# Altium PCB PCB1.PcbDoc
Units mm, origin at the board's own origin, x right, y up, seen from the top; angles counter-clockwise.
Board outline 86.9 x 32.8 mm, 4 copper layers (Top Layer, Signal Layer 1, Internal Plane 1, Bottom Layer), stack 1.48 mm thick; 44 components, 33 nets, 156 pads, 56 vias.
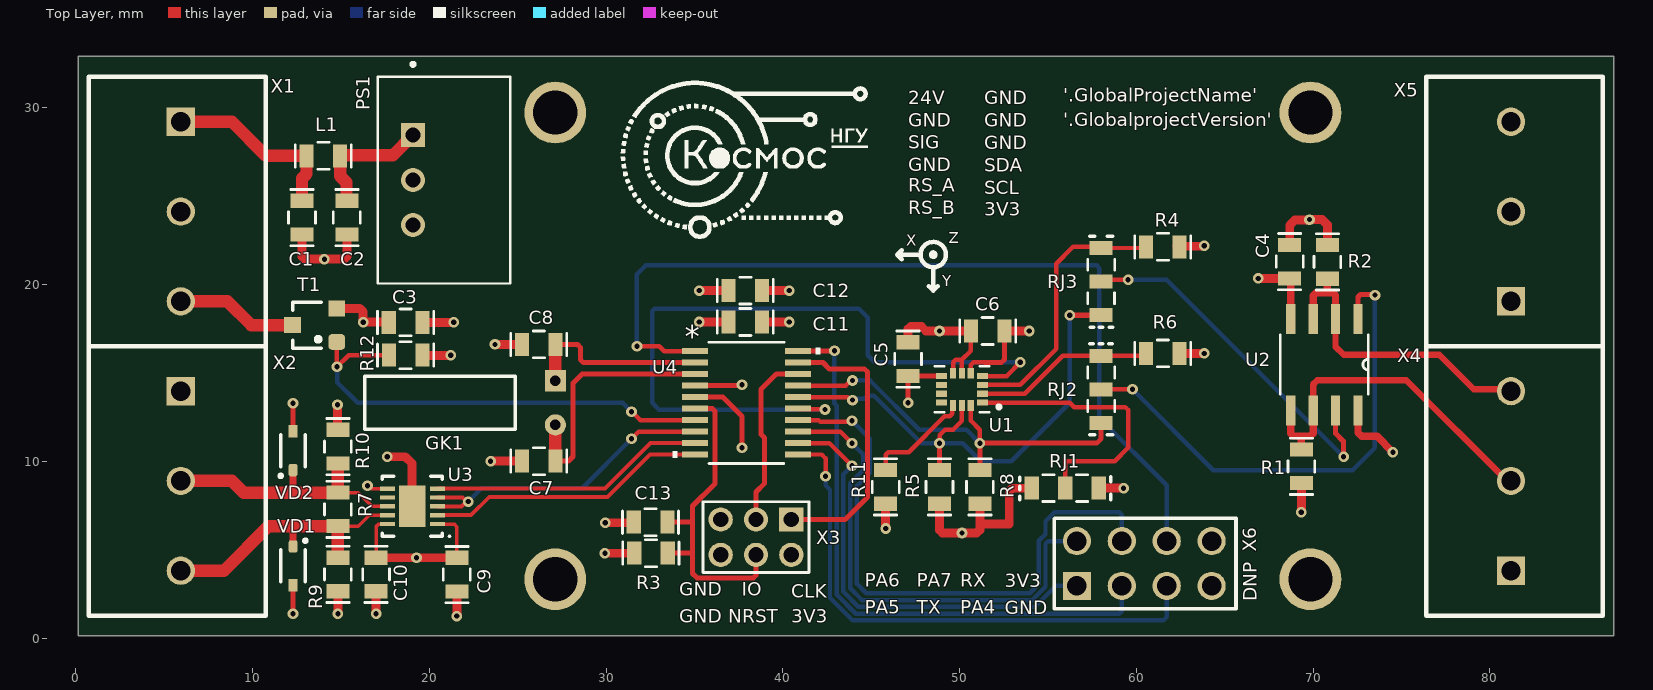
[diagram p0: Top Layer view]
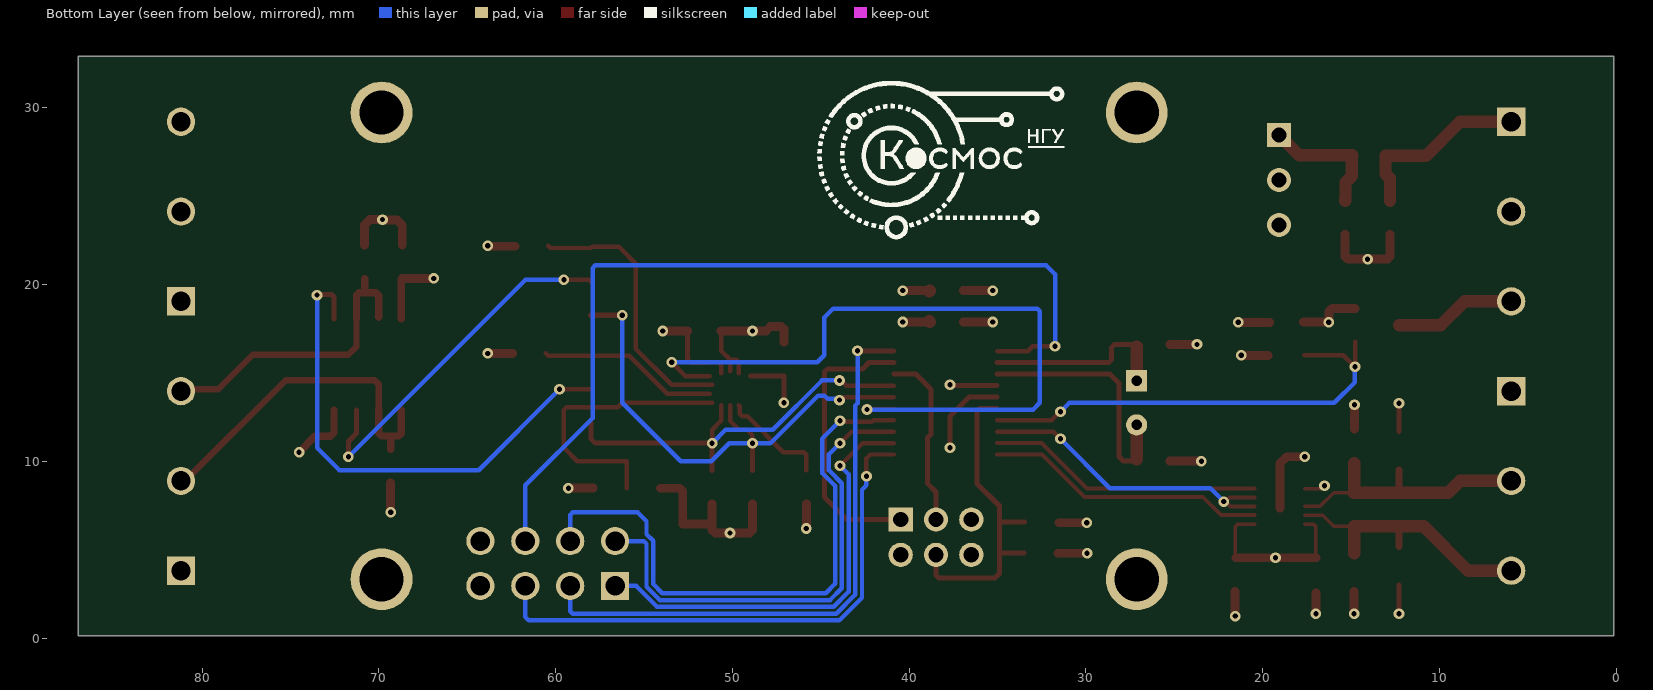
[diagram p1: Bottom Layer view, seen from below]
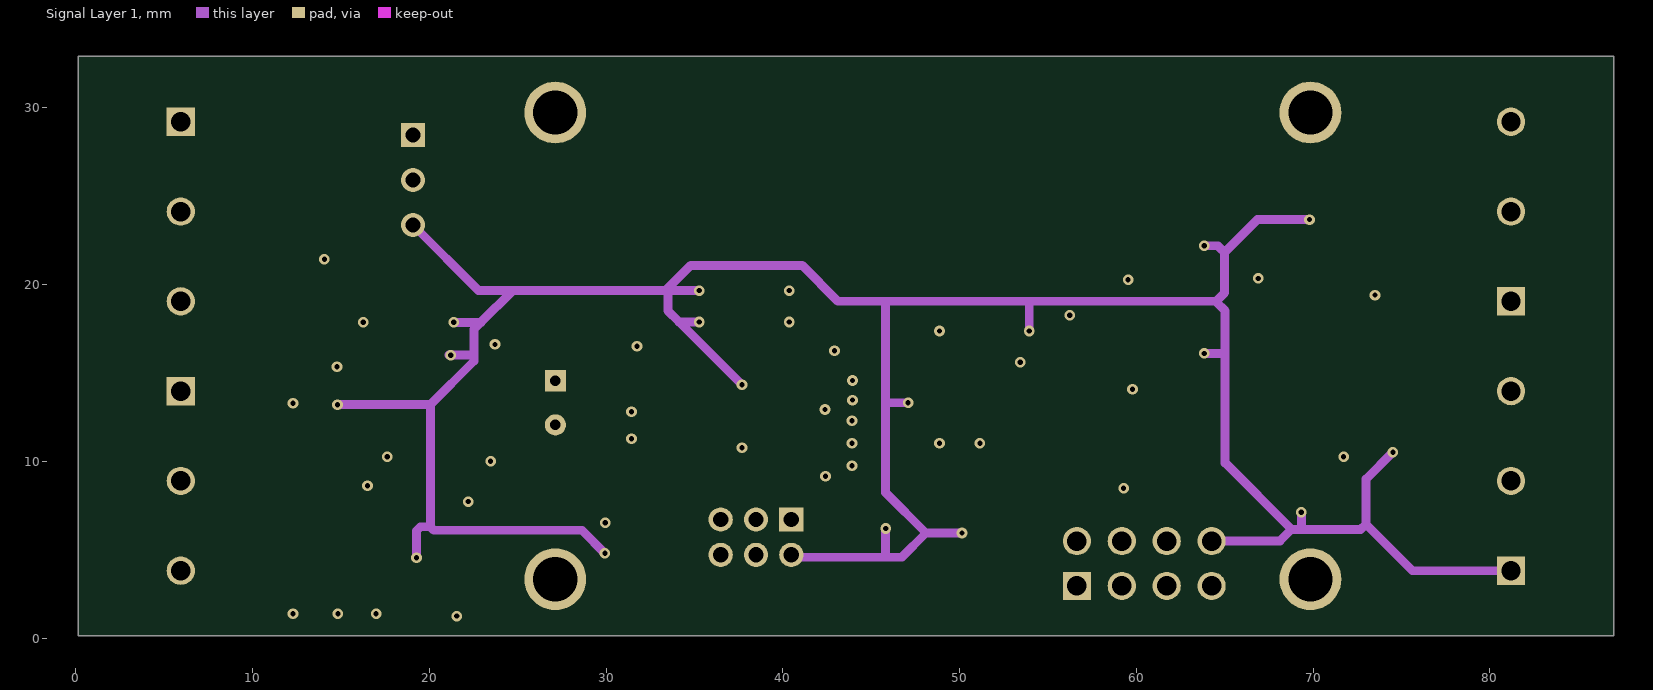
[diagram p2: Signal Layer 1]
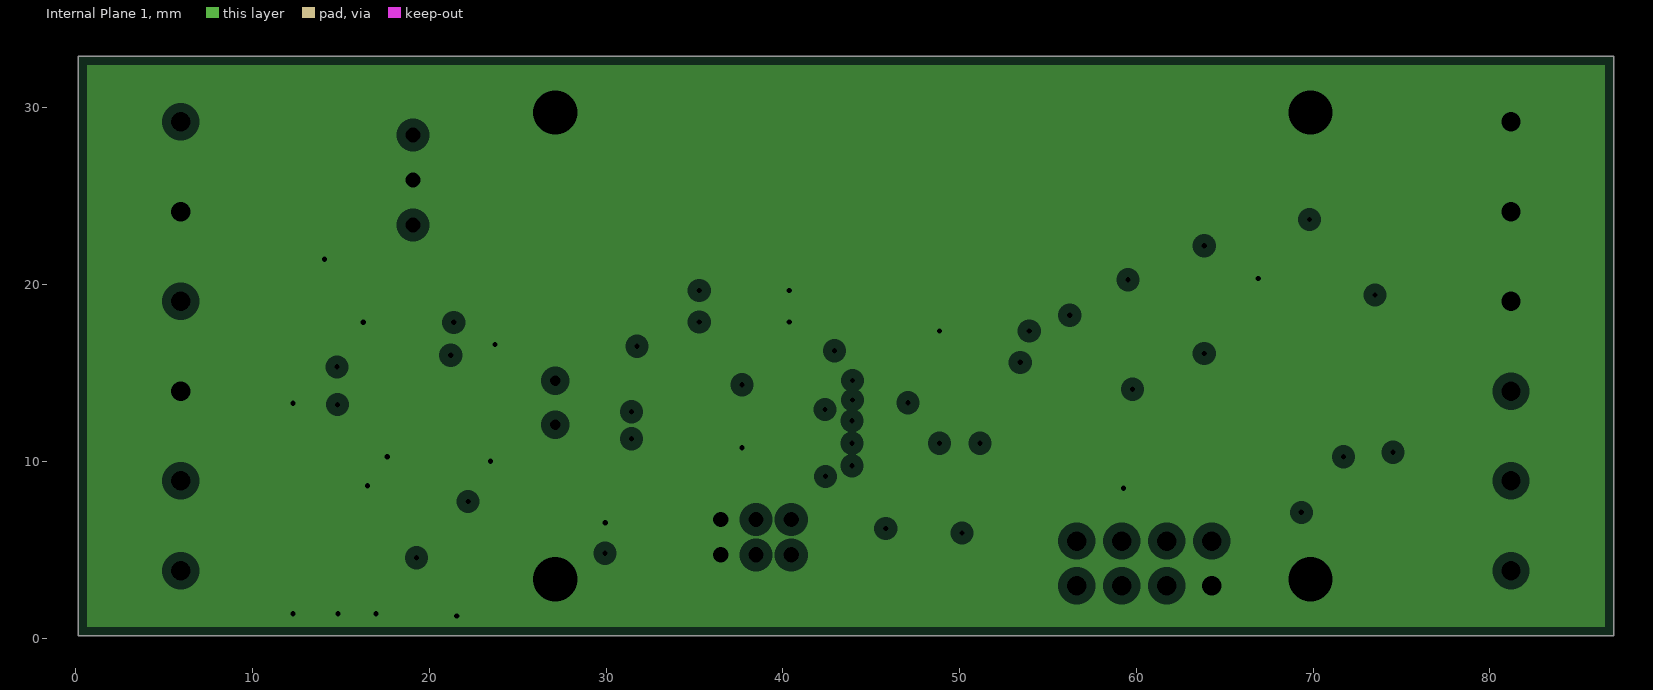
[diagram p3: Internal Plane 1, clearances drawn from the general rule]
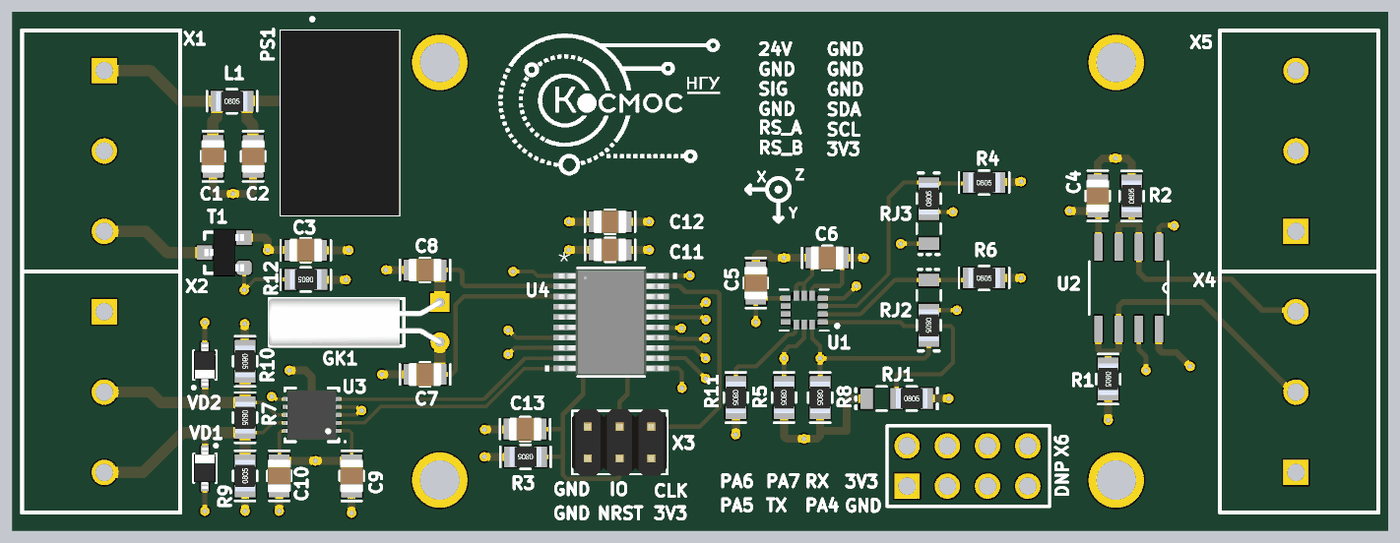
[diagram p4: 3D render of the assembled board from above, using the file's embedded part models]

## Layer stack, top to bottom
Top Solder: solder mask 0.01, Solder Resist, Dk 3.5
Top Layer: signal copper 0.035
Dielectric1: core 0.32, FR-4, Dk 4.8
Signal Layer 1: signal copper 0.035
Dielectric2: core 0.7, FR-4, Dk 4.8
Internal Plane 1: plane copper 0.035, net GND
Dielectric3: core 0.32, FR-4, Dk 4.8
Bottom Layer: signal copper 0.035
Bottom Solder: solder mask 0.01, Solder Resist, Dk 3.5

## Board outline
0.127,0.127 87.027,0.127 87.027,32.927 0.127,32.927

## Design rules (kind name [scope] priority, off if disabled: settings)
Clearance [All] p1: gap=0.254 ignorepadtopadclearanceinfootprint=FALSE except(0.125: Arc-Arc Arc-Track Arc-SMDPad Track-Track Track-SMDPad; 0.14: SMDPad-SMDPad; 0.2: Arc-THPad Arc-Via Arc-Fill Arc-Poly Arc-Region Arc-Text Arc-Hole Track-THPad Track-Via Track-Fill Track-Poly Track-Region Track-Text Track-Hole SMDPad-Text THPad-Text Via-Via Via-Text Fill-Text Poly-Text Region-Text)
HoleSize [All] p1: absolutevalues=TRUE maxlimit=6 minlimit=0.3 maxpercent=80.000 minpercent=20.000
HoleToHoleClearance [All] p1: gap=0.2 allowstackedmicrovias=TRUE
MinimumSolderMaskSliver [All] p1: minsoldermaskwidth=0.005
PlaneClearance [All] p1: clearance=0.508
PlaneConnect [All] p1: planeconnectstyle=Relief reliefexpansion=0.508 reliefentries=4 reliefconductorwidth=0.254 reliefairgap=0.254
PolygonConnect [All] p1: connectstyle=Relief reliefconductorwidth=0.254 reliefentries=4 polygonreliefangle="90 Angle" airgapwidth=0.254
RoutingVias [All] p1: holewidth=0.711 width=1.27 viastyle="Through Hole" minholewidth=0.3 minwidth=0.6 maxholewidth=1 maxwidth=5
SilkToSilkClearance [All] p1: silktosilkclearance=0.01
SilkToSolderMaskClearance [IsPad] p1: minsilkscreentomaskgap=0.01 clearancetoexposedcopper=TRUE
SolderMaskExpansion [All] p1: expansion=0.102 istentingtop=FALSE
Width [All] p1: maxlimit=2 minlimit=0.2 preferedwidth=0.254 minimp=50.000000 maximp=50.000000 favimp=50.000000
23 further rules are at their usual default settings.

## Components (designator, comment, footprint, x,y, rotation, side; value= is the part's Value field where it differs from the comment)
C1 "K10-79" SMD_C0805 12.799,22.837 r90 top value=10u
C2 "K10-79" SMD_C0805 15.339,22.837 r90 top value=10u
C3 "K10-79" SMD_C0805 17.709,17.856 r0 top value=10u
C4 "K10-79" SMD_C0805 68.679,20.343 r90 top value=100n
C5 "K10-79" SMD_C0805 47.089,14.831 r90 top value=100n
C6 "K10-79" SMD_C0805 52.545,17.371 r180 top value=100n
C7 "K10-79" SMD_C0805 25.245,10.005 r0 top value=12p
C8 "K10-79" SMD_C0805 25.245,16.609 r0 top value=12p
C9 "K10-79" SMD_C0805 21.562,2.639 r90 top value=100n
C10 "K10-79" SMD_C0805 16.99,2.644 r90 top value=100n
C11 "K10-79" SMD_C0805 36.929,17.879 r0 top value=100n
C12 "K10-79" SMD_C0805 36.929,19.657 r0 top value=4.7u
C13 "K10-79" SMD_C0805 33.47,6.551 r180 top value=100n
GK1 "32.768k" DT-38T 24.737,13.307 r270 top
L1 "Inductor" SMD_0805 13.053,27.277 r0 top value=5.6u
PS1 "TSR_1-2433" CONV_TSR_1-2433 20.828,25.908 r270 top
R1 "OSM R1-8" SMD_0805 69.342,10.663 r270 top value=240
R2 "OSM R1-8" SMD_0805 70.815,20.325 r90 top value=240
R3 "OSM R1-8" SMD_0805 33.495,4.798 r180 top value=10K
R4 "OSM R1-8" SMD_0805 60.551,22.131 r0 top value=10K
R5 "OSM R1-8" SMD_0805 48.867,9.497 r270 top value=10K
R6 "OSM R1-8" SMD_0805 60.551,16.101 r0 top value=10K
R7 "OSM R1-8" SMD_0805 14.831,8.227 r270 top value=130
R8 "OSM R1-8" SMD_0805 51.153,9.497 r270 top value=10K
R9 "OSM R1-8" SMD_0805 14.831,2.644 r90 top value=750
R10 "OSM R1-8" SMD_0805 14.831,11.783 r270 top value=750
R11 "OSM R1-8" SMD_0805 45.819,9.497 r270 top value=1K
R12 "OSM R1-8" SMD_0805 19.614,16.002 r180 top value=10K
RJ1 "OSM R1-8" SMD_JMP_0805 55.979,8.481 r0 top
RJ2 "OSM R1-8" SMD_JMP_0805 58.011,14.069 r270 top
RJ3 "OSM R1-8" SMD_JMP_0805 58.011,20.165 r90 top
T1 "N-MOSFET" SOT-23 14.766,16.751 r180 top
U1 "LSM6DSOXTR" PQFN50P250X300X86-14N 50.137,14.069 r180 top
U2 "P82B96TD,118" SOIC127P600X175-8N 70.637,15.469 r270 top
U3 "ADM3066EBCPZ" LFCSP-10_3x3 19.045,7.449 r180 top
U4 "STM32G031F6Px" TSSOP20 37.945,13.307 r0 top
VD1 "PESD5V0" SOD-323 12.291,5.179 r270 top
VD2 "PESD5V0" SOD-323 12.291,9.497 r90 top
X1 "Terminal 1x3" DXMG-3WAY 10.741,16.507 r90 top
X2 "Terminal 1x3" DXMG-3WAY 10.741,1.267 r90 top
X3 "Header 2X6" PLD2-6 40.485,6.703 r270 top
X4 "Terminal 1x3" DXMG-3WAY 76.401,16.507 r270 top
X5 "Terminal 1x3" DXMG-3WAY 76.401,31.747 r270 top
X6 "Header 2X8" PBD-8 56.642,2.946 r0 top

## Footprints (in the part's own frame and the unit in brackets; to place one, negate y for a bottom-side part, rotate by r counter-clockwise, add the part's x,y. Pads: shape width x height; smd on the part's side, far side on the other; paste and mask are expansions set on the pad)
CONV_TSR_1-2433 [mm]
  rect 1.358x1.358 hole 0.85: 1(-2.54,-1.75)
  round 1.358 hole 0.85: 2(0,-1.75) 3(2.54,-1.75)
  silkscreen extent -6.65,-3.75 5.85,3.75, body extent -5.85,-3.75 5.85,3.75, height 10.29
DT-38T [mm]
  rect 1.2x1.2 hole 0.6: 1(-1.25,2.4)
  round 1.2 hole 0.6: 2(1.25,2.4)
  silkscreen extent -1.5,-8.38 1.5,0.13, body extent -1.5,-8.43 1.5,2.59, height 3.08
DXMG-3WAY [mm]
  rect 1.6x1.6 hole 1.1: 1(12.7,4.8)
  round 1.6 hole 1.1: 2(7.62,4.8) 3(2.54,4.8)
  silkscreen extent 0,0 15.24,10
LFCSP-10_3x3 [mm] "LFCSP, 10-Leads, Body 3,00x3,00mm, Pitch 0,50mm, Thermal Pad 2,36x1,49mm, IPC Medium Density"
  rect 0.85x0.25 smd mask+0.05: 1(-1.42,1) 2(-1.42,0.5) 3(-1.42,0) 4(-1.42,-0.5) 5(-1.42,-1) 6(1.42,-1) 7(1.42,-0.5) 8(1.42,0) 9(1.42,0.5) 10(1.42,1)
  rect 1.49x2.36 smd mask+0.05: 11(0,0)
  silkscreen extent -2.15,-1.7 1.7,1.75, body extent -1.57,-1.55 1.57,1.55, height 0.8
PBD-8 [mm]
  rect 1.6x1.6 hole 1.1: 1(0,0)
  round 1.6 hole 1.1: 2(0,2.54) 3(2.54,0) 4(2.54,2.54) 5(5.08,0) 6(5.08,2.54) 7(7.62,0) 8(7.62,2.54)
  silkscreen extent -1.27,-1.28 9,3.82, body extent -1.33,-1.2 9.08,3.8, height 8.4
PLD2-6 [mil]
  rect 54x54 hole 34: 1(0,0)
  round 54 hole 34: 2(78.74,0) 3(0,-78.74) 4(78.74,-78.74) 5(0,-157.48) 6(78.74,-157.48)
  silkscreen extent -39,-197 118,39, body extent -43,-197 122,39, height 217
PQFN50P250X300X86-14N [mm]
  rect 0.61x0.35 smd mask+0: 1(-1.16,0.75) 2(-1.16,0.25) 3(-1.16,-0.25) 4(-1.16,-0.75) 8(1.16,-0.75) 9(1.16,-0.25) 10(1.16,0.25) 11(1.16,0.75)
  rect 0.35x0.61 smd mask+0: 5(-0.5,-0.91) 6(0,-0.91) 7(0.5,-0.91) 12(0.5,0.91) 13(0,0.91) 14(-0.5,0.91)
  silkscreen extent -2.19,-1.3 1.55,1.3
SMD_0805 [mm]
  rect 0.8x1.3 smd: 1(0,0) 2(1.9,0)
  silkscreen extent -0.64,-0.76 2.54,0.76, body extent -0.05,-0.62 1.95,0.63, height 0.43
SMD_C0805 [mm]
  rect 0.8x1.3 smd: 1(0,0) 2(1.9,0)
  silkscreen extent -0.64,-0.76 2.54,0.76, body extent -0.1,-0.73 2,0.73, height 1.35
SMD_JMP_0805 [mm]
  rect 0.8x1.3 smd: 1(0,0) 2(1.9,0) 3(-1.896,-0.005)
  silkscreen extent -2.58,-0.76 2.58,0.77, body extent -0.05,-0.62 1.95,0.63, height 0.43
SOD-323 [mm] "SC-76 plastic surface mounted package; 2 leads"
  rrect50% 0.7x0.5 smd: 1(0,0)
  rect 0.7x0.5 smd: 2(2.2,0)
  silkscreen extent -0.38,-0.7 2,0.76, body extent -0.2,-0.67 2.4,0.68, height 1.1
SOIC127P600X175-8N [mil]
  rect 67x21 smd: 1(-102,75) 2(-102,25) 3(-102,-25) 4(-102,-75) 5(102,-75) 6(102,-25) 7(102,25) 8(102,75)
  silkscreen extent -66,-98 66,98
SOT-23 [mm]
  rrect50% 0.95x0.9 smd: 1(0,0)
  rect 0.95x0.9 smd: 2(0,-1.9) 3(2.5,-0.95)
  silkscreen extent 0.87,-2.25 2.5,0.35, body extent 0,-2.45 2.5,0.55, height 1.08
TSSOP20 [mil] "STM32 package, TSSOP20, 6.4 x 4.4mm"
  rect 58x14 smd paste+0 mask+0: 1(-115,115.16) 2(-115,89.57) 3(-115,63.98) 4(-115,38.39) 5(-115,12.8) 6(-115,-12.8) 7(-115,-38.39) 8(-115,-63.98) 9(-115,-89.57) 10(-115,-115.16) 11(115,-115.16) 12(115,-89.57) 13(115,-63.98) 14(115,-38.39) 15(115,-12.8) 16(115,12.8) 17(115,38.39) 18(115,63.98) 19(115,89.57) 20(115,115.16)
  silkscreen extent -164,-135 164,135, body extent -130,-130 130,130, height 47

## Part data
C1 C2 C3 C4 C5 C6 C7 C8 C9 C10 C11 C12 C13: library part Capacitor, "Capacitor", Назначение=SMD-конденсатор, Наименование=К10-79, Напряжение=В, Потребление, Вт=0, Точность=%
GK1: library part Crystal_Generic, "Generic 2-Pin Crystal Oscillator", Назначение="2-Pin Crystal Oscillator", Наименование=GC, Потребление, Вт=0.0
PS1: "1 Amp POL switching regulator, 4.6 to -36 VDC input, pos.-pos. circuit, LM78 compatible, SIP-3", Package="SIP-3 Traco Power", Availability="In Stock", Check_prices=https://www.snapeda.com/parts/TSR%201-2433/Traco%20Power/view-part/6027450/?ref=eda, MF="Traco Power", MP="TSR 1-2433", Price=None, Purchase-URL="https://pricing.snapeda.com/search/part/TSR 1-2433/?ref=eda", SnapEDA_Link=https://www.snapeda.com/parts/TSR%201-2433/Traco%20Power/view-part/6027450/?ref=snap, Назначение=DC-DC, Наименование="TSR 1-2433"
R1 R2 R3 R4 R5 R6 R7 R8 R9 R10 R11 R12: library part Resistor, "Resistor", Назначение=SMD-резистор, Наименование="ОСМ Р1-12", Потребление, Вт=0,001, Точность=%
RJ1 RJ2 RJ3: library part Resistor_Jamper, "Resistor-Jumper", Назначение="Резистор для выбора режима", Наименование=Резистор, Потребление, Вт=0,0
T1: "N channel Generic MosFET", Назначение="N channel Generic MosFET", Наименование=N-MOSFET, Потребление, Вт=0,0
U1: "Accelerometer, Gyroscope, 6 Axis Sensor IÂ²C, SPI Output", Package="VFLGA-14 STMicroelectronics", Availability=Unavailable, MF=STMicroelectronics, MP=LSM6DSOXTR, Price=None, SnapEDA_Link=https://www.snapeda.com/parts/LSM6DSOXTR/STMicroelectronics/view-part/3227828/?ref=snap, Назначение="6-axis IMU", Наименование=LSM6DSOXTR
U2: "Dual bidirectional bus buffer", Package=None, Availability=Unavailable, MP=P82B96TD-118, Price=None
U3: library part ADM3066E, "3.0 V to 5.5 V, ±12 kV IEC ESD Protected, 500 kbps/50 Mbps RS-485 Transceiver", Назначение="RS-485 Transceiver", Наименование=ADM3066EBCPZ, Потребление, Вт=0,1
U4: "The STM32G031x4/x6/x8 mainstream microcontrollers are based on high-performance Arm® Cortex®-M0+ 32-bit RISC core operating at up to 64 MHz frequency.   / 32 Kbytes of Flash program memory and 8 Kbytes of SRAM. With 20pin TSSOP 6.4x4.4 package", Manufacturer_Part_Number=stm32g0_tssop20_t1, Copyright="Copyright (C) 2018 Accelerated Designs. All rights reserved", RefDes=RefDes, Type=DEV, Vendor=STMicroelectronics, Наименование=STM32G031F6Px
VD1 VD2: library part PESDxL1BA, "Low capacitance bidirectional ESD protection diodes", ComponentLink1Description=DataSheet, ComponentLink1URL=https://static.chipdip.ru/lib/635/DOC005635911.pdf, Назначение="ESD защитные диоды", Наименование=PESDxL1BA, Потребление, Вт=0.0
X3: "Header, 6-Pin, Dual row", Назначение="Header, 6-Pin, Dual row", Наименование="Header 2X6", Потребление, Вт=0,0
X6: "Header, 8-Pin, Dual row", Назначение="Header, 8-Pin, Dual row", Наименование="Header 2X8", Потребление, Вт=0,0
L1: Назначение=SMD-индуктивность, Наименование=Индуктивность, Потребление, Вт=0,010
X1 X2 X4 X5: Назначение="Terminal 1x3", Наименование="DXMG 3WAY", Потребление, Вт=0,0

## Free pads (board coordinates)
  round 3.5 hole 2.5: 2(27.127,3.327) 2(27.127,29.727) 2(69.85,3.327) 2(69.85,29.727)

## Via types
v1: diameter 0.6, hole 0.3, Top Layer to Bottom Layer, 56 vias

## Nets (pads, with @x,y where several pads share a name; then routed paths per layer and width w, separated by ;. In a path a pad name is that pad's centre, name@x,y a point inside that pad or via, vN(x,y) a via of type N, cw(c..) or ccw(c..) an arc to the next point about the centre after c; other vN are vias at no path point)
3V3: C3.2 C4.2 C5.1 C6.1 C9.2 C10.2 C11.1 C12.1 PS1.3 R1.2 R2.2 R3.2 R4.2 R5.2 R6.2 R8.2 R10.1 R11.2 R12.1 RJ1.3 U1.5 U1.8 U2.8 U3.1 U3.10 U4.4 X3.2 X4.1 X6.8 | length 229.1
  Top Layer w0.2: C10.2 16.99,6.307 17.107,6.424 17.6,6.424 U3.10 ; U3.1 21.413,6.449 21.562,6.3 C9.2
  Top Layer w0.254: R10.1@14.806,11.808 R10.1 ; R12.1@19.68,16.002 R12.1@19.692,15.99 ; C5.1@47.089,14.819 C5.1 ; U1.5 50.637,15.444 50.786,15.593 51.407,15.593 ; 51.153,6.449 51.158,6.444 ; R4.2@62.263,22.131 R4.2@62.329,22.197
  Top Layer w0.28: C5.1@47.089,14.819 U1.8 ; 51.407,15.593 52.381,15.593 52.545,15.757 C6.1
  Top Layer w0.284: U4.4 37.65,14.282 v1(37.691,14.323)
  Top Layer w0.3: v1(47.089,13.307) C5.1@47.089,14.819
  Top Layer w0.42: U2.8 72.542,11.608 72.746,11.405 73.629,11.405 v1(74.521,10.513)
  Top Layer w0.5: R10.1@14.806,11.808 v1(14.806,13.205) ; C10.2 v1(19.276,4.544) ; v1@19.278,4.541 C9.2@21.509,4.541 ; C3.2 v1(21.387,17.856) ; R12.1@19.692,15.99 v1(21.215,15.99) ; v1(29.939,4.798) R3.2 ; v1(35.278,17.879) C11.1 ; v1(35.278,19.657) C12.1 ; v1(45.819,6.195) R11.2 ; R5.2 48.867,6.117 49.043,5.941 v1(50.137,5.941) 50.977,5.941 51.153,6.117 51.153,6.449 ; R8.2 51.153,6.449 ; C6.1 v1(53.947,17.371) ; RJ1.3 52.989,8.476 52.813,8.3 52.813,6.449 51.153,6.449 ; R4.2@62.313,22.164 v1@63.82,22.164 ; R6.2 v1(63.853,16.101) ; C4.2 68.679,23.352 68.981,23.654 69.78,23.654 v1(69.799,23.673) 70.522,23.673 70.815,23.38 R2.2 ; v1(69.342,7.107) R1.2
  Signal Layer 1 w0.254: 22.442,16.016 22.53,16.104 ; 45.72,4.572 45.819,4.671 ; 69.342,6.172 69.367,6.147
  Signal Layer 1 w0.3: 53.934,19.007 53.947,19.004
  Signal Layer 1 w0.5: v1(14.806,13.205) 20.063,13.205 ; PS1.3 22.789,19.657 24.721,19.657 ; v1(19.276,4.544) 19.276,6.068 19.505,6.297 20.063,6.297 ; v1@21.119,16.016 22.442,16.016 ; v1(21.387,17.856) 22.92,17.856 ; v1(29.939,4.798) 28.641,6.096 20.264,6.096 20.063,6.297 ; 33.627,19.657 v1(35.278,19.657) ; v1(35.278,17.879) 34.135,17.879 ; v1(37.691,14.323) 34.135,17.879 ; X3.2 40.616,4.572 45.72,4.572 46.736,4.572 48.105,5.941 ; 45.819,4.671 v1(45.819,6.195) ; v1(47.089,13.307) 45.819,13.307 ; v1(50.137,5.941) 48.105,5.941 ; v1(53.947,17.371) 53.947,18.987 ; v1(63.853,16.101) 64.869,16.101 ; v1(63.853,22.197) 64.615,22.197 64.869,21.943 ; X6.8 68.123,5.486 68.783,6.147 ; 69.342,6.172 v1(69.342,7.107) v1@69.361,7.088 ; v1(69.799,23.673) 66.853,23.673 64.996,21.816 64.996,19.53 64.52,19.054 ; v1(74.521,10.513) 72.997,8.989 72.997,6.44 ; X4.1 75.629,3.807 72.997,6.44 ; 20.063,6.297 20.063,13.205 ; 20.063,13.205 22.53,15.672 22.53,16.104 22.53,17.466 22.92,17.856 ; 22.92,17.856 24.721,19.657 ; 24.721,19.657 33.373,19.657 33.5,19.784 ; 33.5,19.784 34.798,21.082 41.092,21.082 43.12,19.054 45.819,19.054 ; 33.5,19.784 33.5,18.514 34.135,17.879 ; 45.819,13.307 45.819,19.054 ; 45.819,13.307 45.819,8.227 48.105,5.941 ; 45.819,19.054 64.52,19.054 ; 64.52,19.054 64.503,19.037 65.024,18.516 65.024,9.906 68.783,6.147 ; 68.783,6.147 69.367,6.147 72.704,6.147 72.997,6.44
24V: C1.2 L1.1 X1.1 | length 10.6
  Top Layer w0.7: X1.1 8.837,29.207 10.767,27.277 L1.1 13.053,26.261 12.799,26.007 C1.2
EXT_SCL: R1.1 U2.5 U2.6 X4.2 | length 19.9
  Top Layer w0.36: U2.6 70.002,14.341 70.239,14.577 75.283,14.577 80.973,8.887 X4.2
  Top Layer w0.42: U2.5 68.732,11.579 68.881,11.43 69.342,11.43 ; R1.1 69.342,11.43 ; U2.6 70.002,11.579 69.854,11.43 69.342,11.43
EXT_SDA: R2.1 U2.2 U2.3 X4.3 | length 17.3
  Top Layer w0.254: U2.3 U2.3@70.119,18.176
  Top Layer w0.36: U2.2 71.272,16.485 71.734,16.023 77.139,16.023 79.093,14.069 81.1,14.069 X4.3
  Top Layer w0.42: U2.3@70.002,18.176 70.002,19.355 70.18,19.533 71.124,19.533 71.272,19.384 U2.2 ; 70.815,19.681 R2.1
GND: C1.1 C2.1 C3.1 C4.1 C5.2 C6.2 C7.1 C8.1 C9.1 C10.1 C11.2 C12.2 C13.2 pad.2 PS1.2 R9.1 RJ1.2 T1.2 U1.6 U1.7 U2.4 U3.6 U3.11 U4.5 VD1.2 VD2.2 X1.2 X2.1 X3.5 X3.6 X5.1 X5.2 X5.3 X6.7 | length 47.8
  Top Layer w0.2: v1@16.601,8.608 16.76,8.449 U3.6
  Top Layer w0.254: v1(16.507,8.608) v1@16.601,8.608 ; C13.2@31.544,6.525 C13.2 ; U1.7 49.637,15.596 49.786,15.744 50.129,15.744 ; U1.6@50.129,15.085 50.129,15.744 ; C6.2 50.645,16.26 50.129,15.744 ; C4.1 C4.1@68.732,20.289
  Top Layer w0.284: U4.5 36.604,13.632 37.691,12.545 v1(37.691,10.767)
  Top Layer w0.3: v1(12.291,1.369) VD1.2 ; VD2.2 v1(12.291,13.282) ; v1(16.256,17.856) v1@16.281,17.882 ; C10.1@16.99,2.555 C10.1@17.029,2.594
  Top Layer w0.42: U2.4 C4.1@68.732,20.289
  Top Layer w0.5: C1.1 12.799,21.584 12.948,21.435 v1(14.069,21.435) 15.19,21.435 15.339,21.584 C2.1 ; T1.2 16.061,18.651 16.256,18.456 v1(16.256,17.856) ; v1(14.831,1.369) R9.1 ; v1@16.281,17.882 C3.1@17.704,17.882 ; v1(16.99,1.369) C10.1@16.99,2.555 ; v1(17.625,10.259) 18.641,10.259 19.022,9.878 U3.11@19.022,7.338 ; v1(21.562,1.242) C9.1 ; v1(23.467,10.005) C7.1 ; v1(23.721,16.609) C8.1 ; v1(29.964,6.525) C13.2@31.544,6.525 ; C11.2 v1(40.358,17.879) ; C12.2 v1(40.358,19.657) ; C5.2 47.089,17.476 47.238,17.625 47.851,17.625 48.105,17.371 C6.2 ; RJ1.2 v1(59.281,8.481) ; v1(66.901,20.343) C4.1
  Top Layer w0.7: C11.2 C11.2@38.873,17.923 ; C12.2 C12.2@38.873,19.613
  other v1: 48.867,17.371
HARDSTOP_SIG: R12.2 T1.1 U4.7 | length 26.6
  Top Layer w0.254: T1.1 14.773,16.744 14.773,15.346 v1(14.78,15.339) 15.443,16.002 R12.2@17.656,16.002 ; v1(31.443,12.799) 31.472,12.799 31.939,12.332 U4.7
  Bottom Layer w0.254: v1(14.78,15.339) 14.78,14.475 15.949,13.307 30.935,13.307 v1(31.443,12.799)
I2C_SCL: R5.1 RJ3.3 U1.13 U4.16 | length 29.6
  Top Layer w0.254: U4.16 43.678,13.632 43.848,13.462 v1(43.942,13.462) ; v1(48.867,11.021) 48.868,11.475 49.18,11.788 49.634,11.788 50.137,12.291 U1.13
  Top Layer w0.3: R5.1 v1(48.867,11.021) ; v1(56.233,18.26) 56.237,18.264 58.011,18.264 RJ3.3
  Bottom Layer w0.25: v1(48.867,11.021) 50.19,11.021 51.206,10.005 52.931,10.005 56.233,13.307 v1(56.233,18.26)
  Bottom Layer w0.254: v1(43.942,13.462) 44.008,13.528 44.61,13.528 44.798,13.716 45.156,13.716 47.851,11.021 v1(48.867,11.021)
I2C_SDA: R8.1 RJ2.2 U1.14 U4.17 | length 23.6
  Top Layer w0.254: U4.17 43.56,14.282 43.848,14.57 v1(43.942,14.57) ; U1.14@50.645,13.159 50.645,12.291 51.153,11.783 v1(51.153,11.021)
  Top Layer w0.28: v1(51.153,11.021) 57.757,11.021 58.011,11.275 RJ2.2
  Top Layer w0.3: R8.1 v1(51.153,11.021)
  Bottom Layer w0.254: v1(43.942,14.57) 44.939,14.57 47.726,11.783 50.391,11.783 v1(51.153,11.021)
Int: U1.4 U4.15 | length 42.5
  Top Layer w0.254: U4.15 40.894,12.954 42.362,12.954 v1(42.39,12.926) ; U1.4 52.665,14.819 v1(53.439,15.593)
  Bottom Layer w0.254: v1(42.39,12.926) 32.992,12.926 32.611,13.307 32.611,18.492 32.76,18.641 44.295,18.641 44.803,18.133 44.803,15.996 45.206,15.593 v1(53.439,15.593)
MSCL: R4.1 RJ3.2 U1.3 | length 15.4
  Top Layer w0.254: U1.3@51.153,14.337 51.163,14.327 53.443,14.327 55.471,16.355 55.471,21.181 56.421,22.131 57.945,22.131 RJ3.2 60.297,22.065 R4.1@60.429,22.197
MSDA: R6.1 RJ2.3 U1.2 | length 10.2
  Top Layer w0.254: U1.2 53.697,13.819 55.843,15.965 RJ2.3 60.415,15.965 R6.1
NetC2_2: C2.2 L1.2 PS1.1 | length 7.3
  Top Layer w0.7: L1.2@14.925,27.305 L1.2 14.953,26.139 15.315,25.777 15.315,24.787 15.339,24.763 C2.2 ; L1.2@15.003,27.305 17.935,27.305 PS1.1
NetC13_1: C13.1 R3.1 U4.6 X3.4 | length 18.6
  Top Layer w0.284: C13.1 34.897,6.551 ; R3.1 34.897,4.798 ; U4.6 36.018,12.982 36.167,12.833 36.167,8.735 34.897,7.465 34.897,6.551 ; X3.4 38.485,3.55 38.336,3.401 35.151,3.401 34.897,3.655 34.897,4.798 ; 34.897,4.798 34.897,6.551
NetR11_1: R11.1 U1.12 | length 6.1
  Top Layer w0.254: R11.1 45.819,10.364 45.968,10.513 47.121,10.513 49.153,12.545 49.443,12.545 49.591,12.694 49.591,13.113 U1.12
NetRJ1_1: RJ1.1 U1.1 | length 16.1
  Top Layer w0.254: U1.1@51.153,13.307 51.157,13.311 56.229,13.311 56.487,13.053 59.386,13.053 59.535,12.904 59.535,10.767 58.773,10.005 55.979,10.005 RJ1.1
NetRJ2_1: RJ2.1 U2.1 | length 28.8
  Top Layer w0.254: RJ2.1 v1(59.789,14.069) ; v1@73.477,19.431 v1(73.505,19.403)
  Top Layer w0.3: U2.1 72.542,19.282 72.691,19.431 v1@73.477,19.431
  Bottom Layer w0.254: v1(59.789,14.069) 64.361,9.497 72.235,9.497 73.505,10.767 v1(73.505,19.403)
NetRJ3_1: RJ3.1 U2.7 | length 20.7
  Top Layer w0.254: RJ3.1 58.122,20.276 v1(59.535,20.276)
  Top Layer w0.3: U2.7 71.272,11.582 71.727,11.128 v1(71.727,10.259)
  Bottom Layer w0.254: v1(59.535,20.276) 61.71,20.276 v1(71.727,10.259)
OSC32_IN: C8.2 GK1.1 U4.2 | length 10.6
  Top Layer w0.284: C8.2 28.381,16.609 28.547,16.443 28.547,15.748 28.713,15.582 U4.2
  Top Layer w0.7: GK1.1 C8.2@27.137,16.495
OSC32_OUT: C7.2 GK1.2 U4.3 | length 14.3
  Top Layer w0.284: C7.2@27.137,10.119 27.251,10.005 27.873,10.005 28.133,10.265 28.133,14.417 28.648,14.932 U4.3
  Top Layer w0.7: C7.2@27.137,10.119 GK1.2
PA4: U4.11 X6.5 | length 31
  Top Layer w0.254: U4.11 42.196,10.382 42.418,10.16 v1(42.418,9.144)
  Bottom Layer w0.254: v1(42.418,9.144) 42.418,8.636 42.672,8.382 42.672,2.286 43.965,0.993 61.524,0.993 61.722,1.19 X6.5
PA5: U4.12 X6.1 | length 25
  Top Layer w0.254: U4.12 42.633,11.032 v1(43.914,9.751)
  Bottom Layer w0.254: v1(43.914,9.751) 43.431,9.268 43.431,2.614 44.276,1.769 54.271,1.769 55.448,2.946 X6.1
PA6: U4.13 X6.2 | length 28
  Top Layer w0.254: U4.13 43.253,11.682 v1(43.914,11.021)
  Bottom Layer w0.254: v1(43.914,11.021) 44.541,10.394 44.541,9.491 43.81,8.761 43.81,2.819 44.481,2.148 54.114,2.148 54.864,2.898 54.864,5.338 55.013,5.486 X6.2
PA7: U4.14 X6.4 | length 33.5
  Top Layer w0.254: U4.14 42.021,12.332 42.108,12.245 43.868,12.245 v1(43.914,12.291)
  Bottom Layer w0.254: v1(43.914,12.291) 44.92,11.285 44.92,9.334 44.196,8.61 44.196,3.068 44.724,2.54 53.97,2.54 54.485,3.055 54.485,5.495 54.864,5.874 54.864,6.604 55.372,7.112 59.033,7.112 59.182,6.963 X6.4
"RS485 A": R7.1 R10.2 U3.8 VD2.1 X2.2 | length 15.1
  Top Layer w0.2: R7.1@14.953,8.227 15.984,8.227 16.762,7.449 U3.8
  Top Layer w0.4: 12.291,8.227 VD2.1
  Top Layer w0.7: X2.2 8.837,8.887 9.497,8.227 12.291,8.227 R7.1 ; R10.2 R7.1 ; R7.1@14.853,8.227 R7.1
"RS485 B": R7.2 R9.2 U3.9 VD1.1 X2.3 | length 15.8
  Top Layer w0.2: R7.2 15.776,6.327 15.778,6.326 15.978,6.326 16.601,6.949 U3.9
  Top Layer w0.254: 12.087,6.327 12.291,6.123
  Top Layer w0.4: VD1.1 12.291,6.123
  Top Layer w0.7: X2.3 8.379,3.807 10.899,6.327 12.087,6.327 R7.2 R9.2@14.831,4.793
SIG: T1.3 X1.3 | length 6.9
  Top Layer w0.7: X1.3 8.583,19.047 9.929,17.701 T1.3
SWCLK: U4.19 X3.1 | length 16.1
  Top Layer w0.284: X3.1 43.533,6.703 44.803,7.973 44.803,15.046 44.637,15.212 42.644,15.212 42.274,15.582 U4.19
SWDIO: U4.18 X3.3 | length 10.1
  Top Layer w0.284: X3.3 38.485,8.259 38.976,8.75 38.976,11.321 38.773,11.524 38.773,14.07 39.635,14.932 U4.18
"Tx/Rx MODE": U3.3 U3.4 U4.8 | length 18
  Top Layer w0.225: U3.3 21.833,7.449 22.103,7.719 21.873,7.949 U3.4
  Top Layer w0.254: v1@22.103,7.719 v1(22.197,7.719) ; v1(31.443,11.275) 31.85,11.682 U4.8
  Bottom Layer w0.254: v1(22.197,7.719) 22.959,8.481 28.649,8.481 v1(31.443,11.275)
UART1_RX: U4.1 X6.6 | length 50.9
  Top Layer w0.254: v1(31.75,16.51) 33.02,16.51 33.298,16.232 U4.1
  Bottom Layer w0.254: v1(31.75,16.51) 31.75,20.574 32.258,21.082 57.763,21.082 57.912,20.933 57.912,12.446 61.722,8.636 X6.6
UART1_TX: U4.20 X6.3 | length 34
  Top Layer w0.254: U4.20 U4.20@40.878,16.244 ; v1@42.914,16.244 v1(42.926,16.256)
  Top Layer w0.284: U4.20@40.878,16.244 v1@42.914,16.244
  Bottom Layer w0.254: v1(42.926,16.256) 42.926,13.277 43.052,13.15 43.052,2.457 44.137,1.372 59.033,1.372 59.182,1.52 X6.3
UART2_RX: U3.2 U4.10 | length 16
  Top Layer w0.225: U3.2 22.37,6.949 23.394,7.973 30.071,7.973 32.48,10.382 U4.10
UART2_TX: U3.5 U4.9 | length 15.6
  Top Layer w0.225: U3.5 29.934,8.449 32.517,11.032 U4.9
pads on no net: U1.9 U1.10 U1.11 U3.7

## Polygon pours and split planes (outlines as drawn)
GND on Internal Plane 1 (split plane): 86.517,0.637 0.637,0.637 0.637,32.417 86.517,32.417

## Silkscreen, mask and mechanical layers (free items; w line width, h text height)
Top Overlay:
  drawing of 2088 lines, arcs and shapes, not listed
  text "'.GlobalProjectName'" at 55.88,30.353 h0.76
  text "24V" at 47.089,30.198 h0.76
  text "GND" at 51.407,30.198 h0.76
  text "'.GlobalprojectVersion'" at 55.88,28.956 h0.76
  text "GND" at 47.089,28.928 h0.76
  text "GND" at 51.407,28.928 h0.76
  text "SIG" at 47.089,27.686 h0.76
  text "GND" at 51.407,27.658 h0.76
  text "GND" at 47.089,26.416 h0.76
  text "SDA" at 51.407,26.388 h0.76
  text "RS_A" at 47.089,25.245 h0.76
  text "SCL" at 51.407,25.118 h0.76
  text "RS_B" at 47.089,23.975 h0.76
  text "3V3" at 51.407,23.876 h0.76
  text "Z" at 49.403,22.327 h0.61
  text "X" at 46.99,22.2 h0.61
  text "Y" at 49.022,19.914 h0.61
  text "PA6" at 44.651,2.893 h0.76
  text "PA7" at 47.572,2.893 h0.76
  text "RX" at 50.038,2.893 h0.76
  text "3V3" at 52.55,2.868 h0.76
  text "GND" at 34.135,2.385 h0.76
  text "IO" at 37.691,2.385 h0.76
  text "CLK" at 40.485,2.286 h0.76
  text "DNP" at 66.802,2.083 h0.76 r90
  text "PA5" at 44.651,1.369 h0.76
  text "TX" at 47.572,1.369 h0.76
  text "PA4" at 50.038,1.369 h0.76
  text "GND" at 52.55,1.344 h0.76
  text "GND" at 34.135,0.861 h0.76
  text "NRST" at 36.929,0.861 h0.76
  text "3V3" at 40.485,0.861 h0.76
Bottom Overlay:
  drawing of 2080 lines, arcs and shapes, not listed
Mechanical 1:
  lines w0.254: 27.305,0.127 0.127,0.127 ; 0.127,0.127 87.027,0.127 87.027,32.927 0.127,32.927 0.127,0.127

## Text inside footprints (layer, text, board x,y; h text height)
U4: Top Overlay "*" at 34.452,16.461 h1.27; Mechanical 13 "*" at 35.773,15.263 h1.27